# Altium PCB KRing_B2_A.PcbDoc
Units mm, origin at the board's own origin, x right, y up, seen from the top; angles counter-clockwise.
Board outline 37.8 x 37.8 mm, 2 copper layers (Top Layer, Bottom Layer); 63 components, 35 nets, 226 pads, 135 vias.
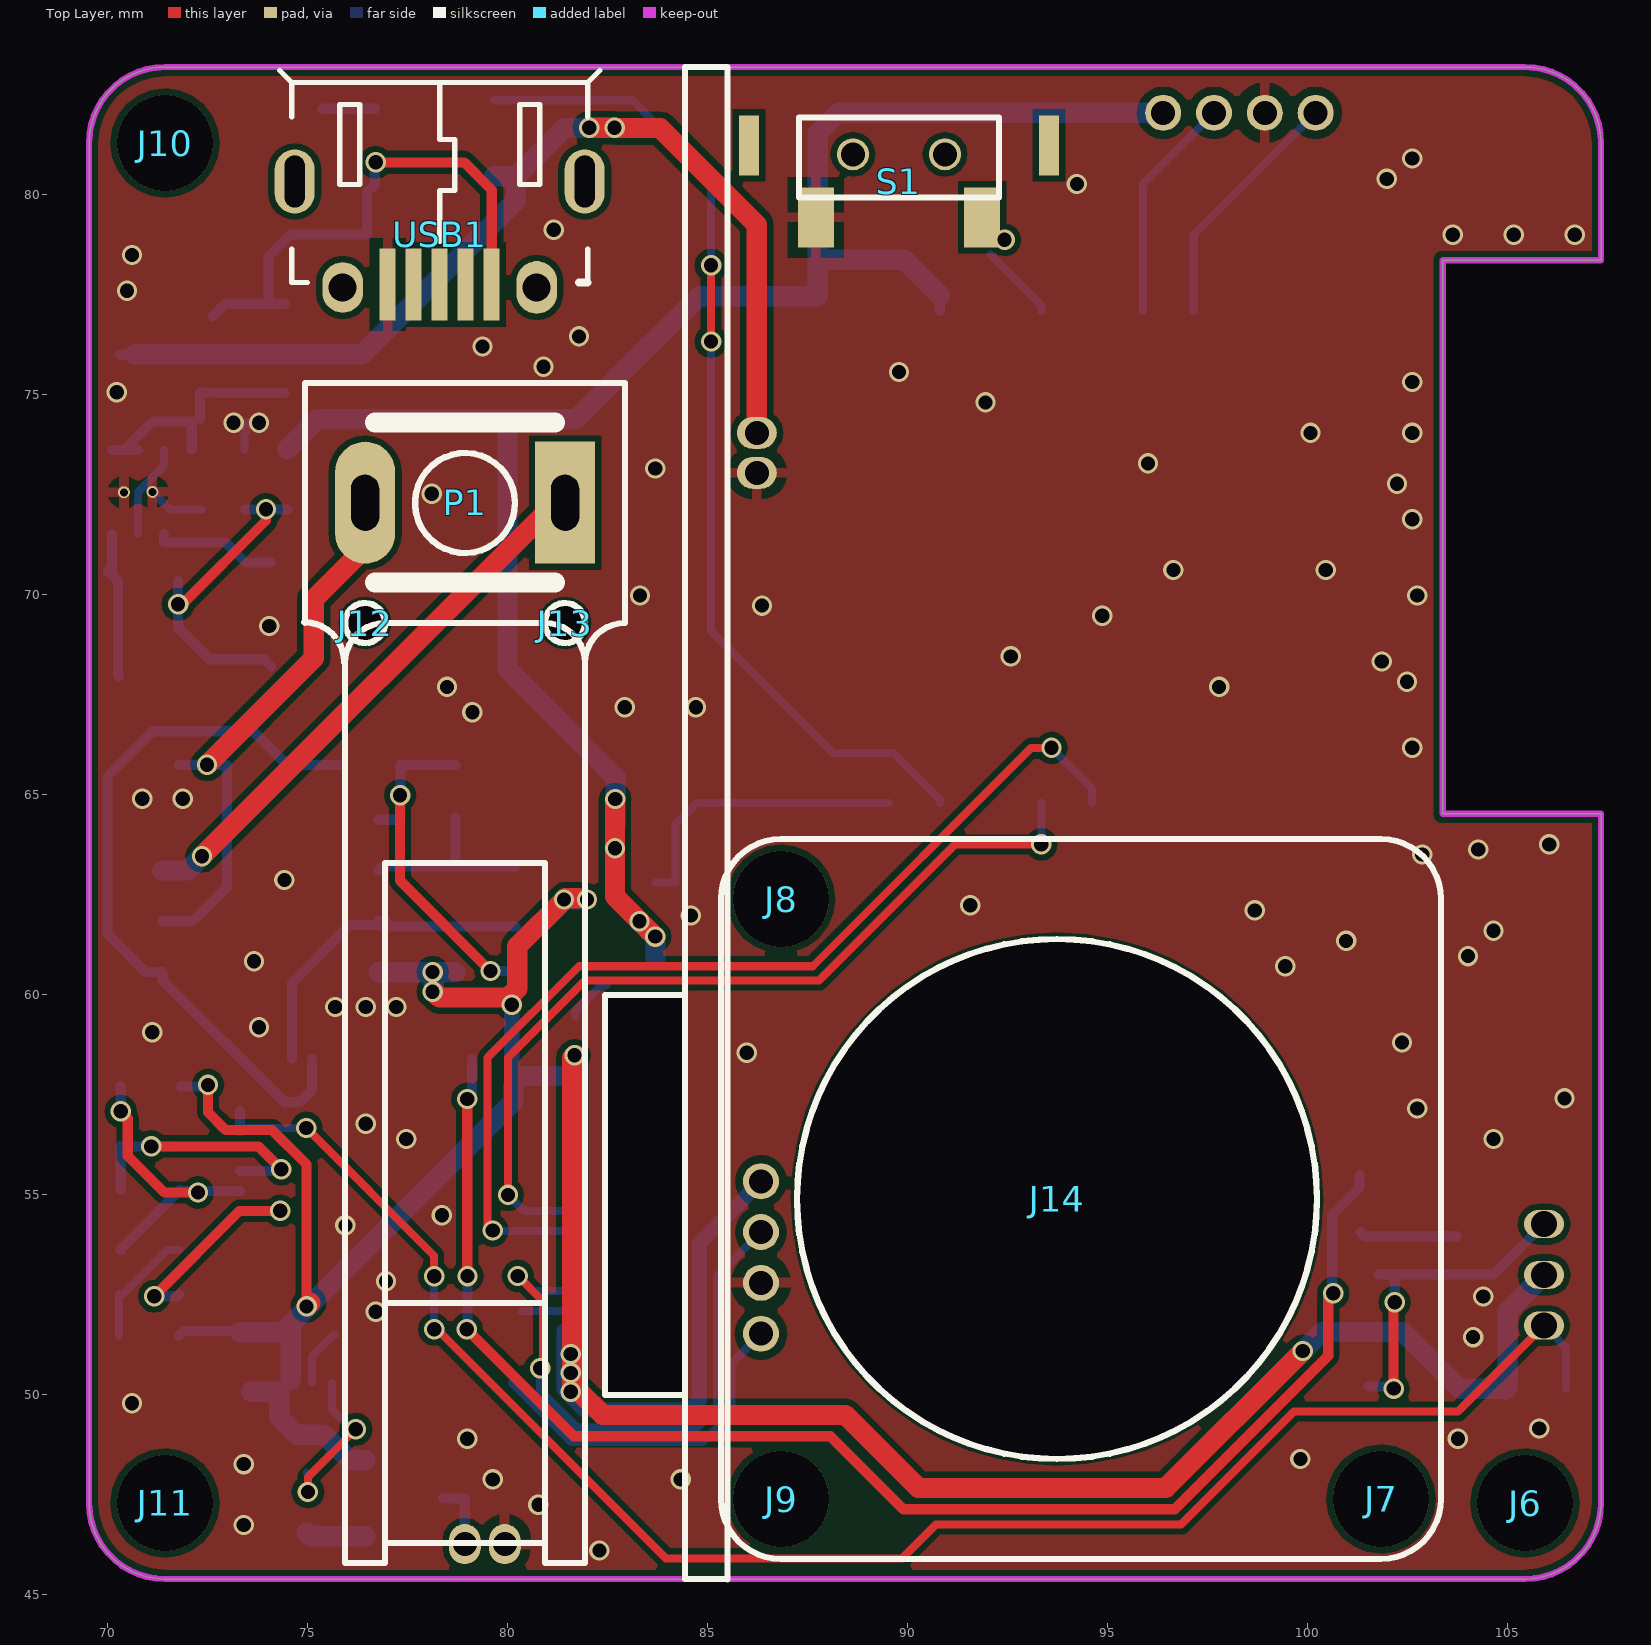
[diagram p0: Top Layer view]
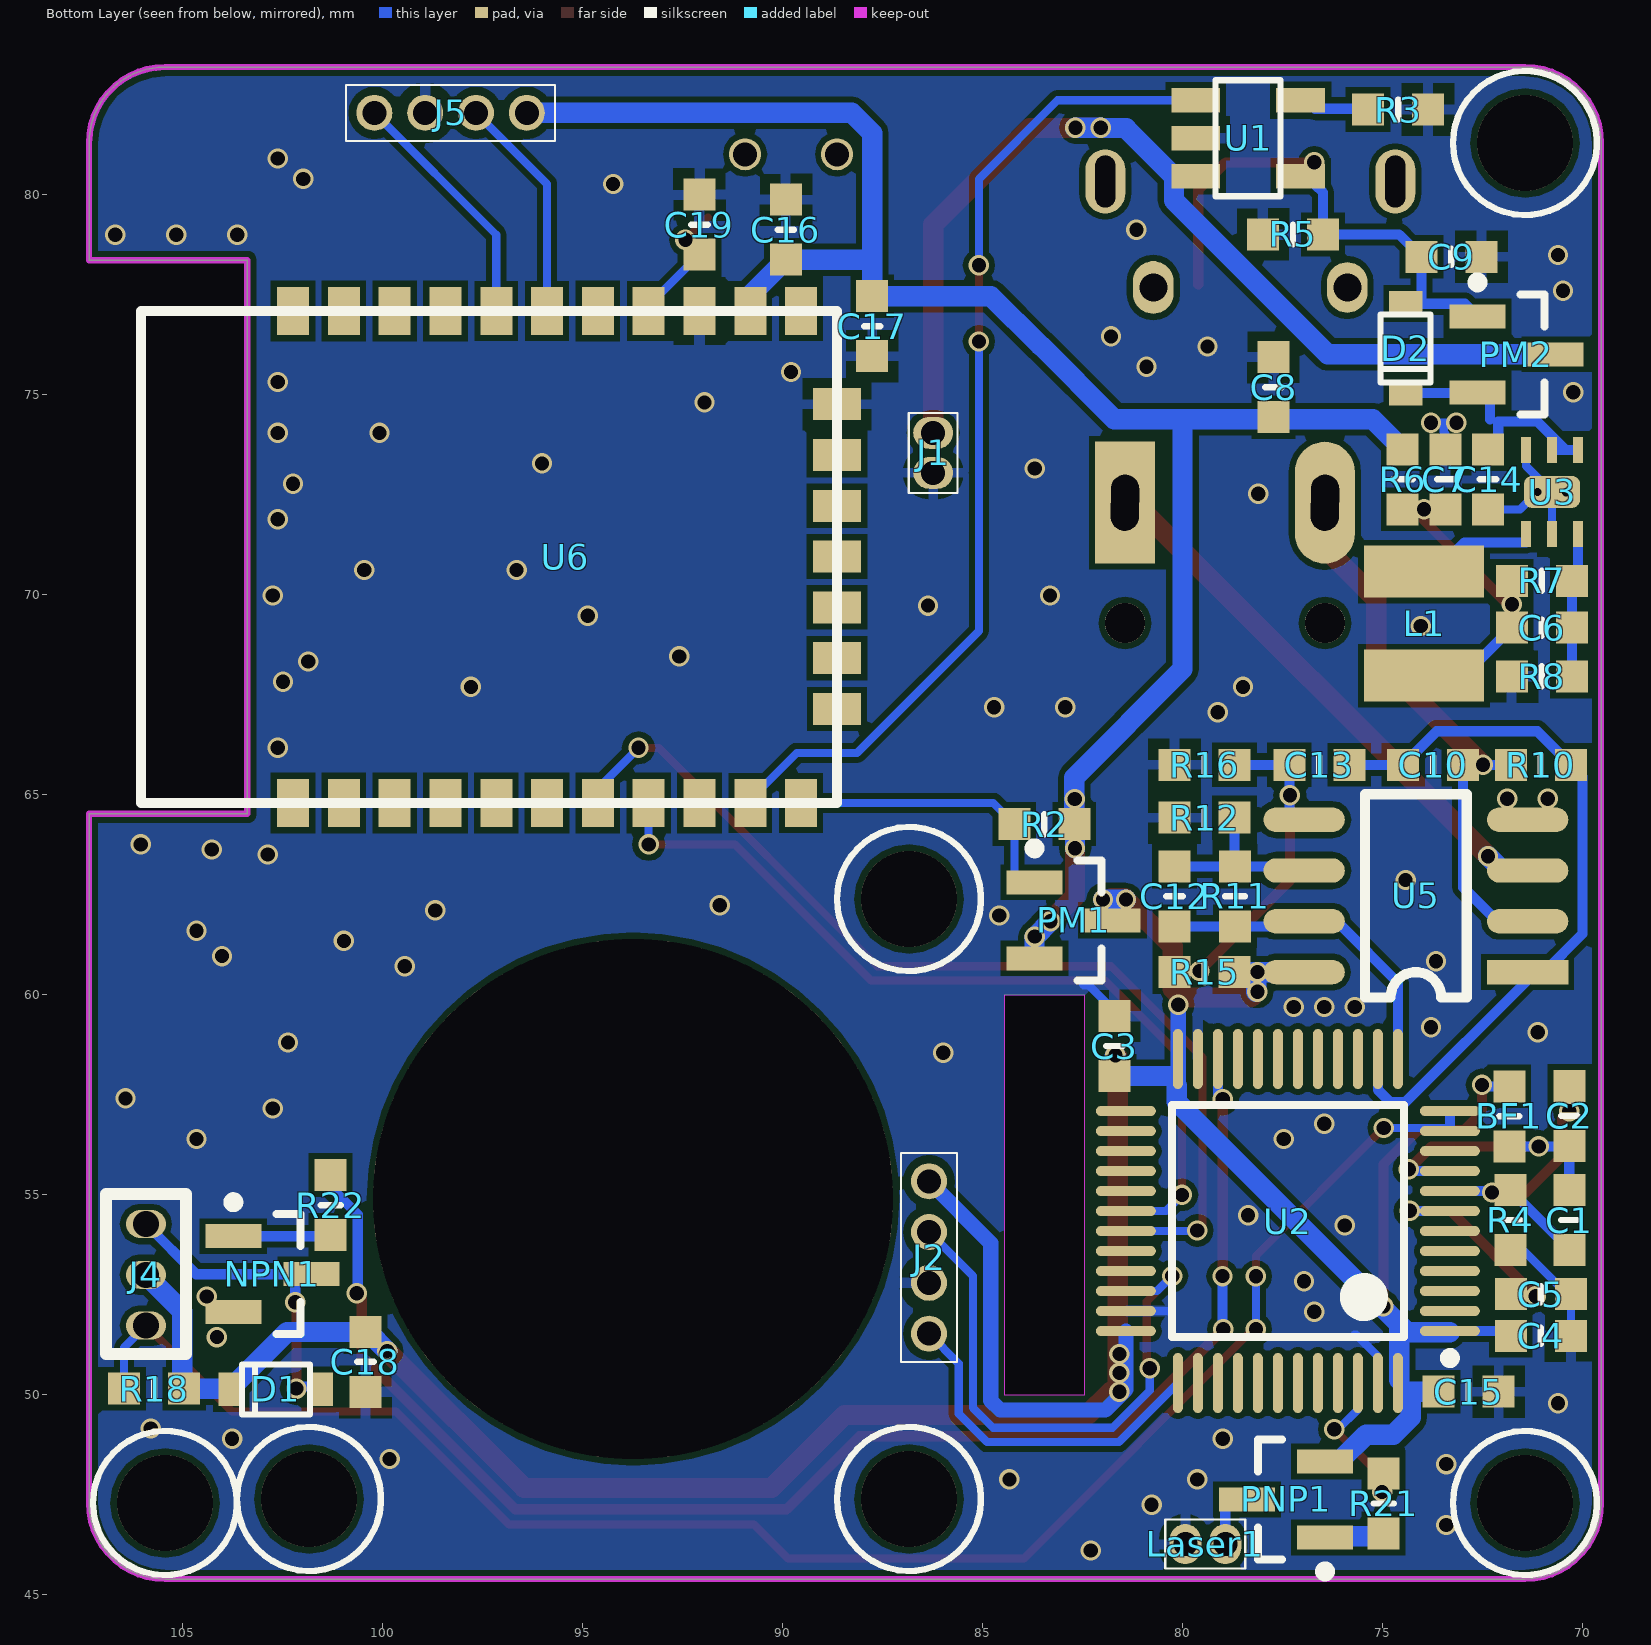
[diagram p1: Bottom Layer view, seen from below]

## Layer stack, top to bottom
Top Layer: signal copper 0.0356
Dielectric: dielectric 0.32, FR-4, Dk 4.8
Bottom Layer: signal copper 0.0356

## Board outline
69.537,47.288 69.537,81.288 cw(c71.437,81.288) 71.437,83.188 105.437,83.188 cw(c105.437,81.288) 107.337,81.288 107.337,78.359 103.378,78.359 103.378,64.516 107.337,64.516 107.337,47.288 cw(c105.437,47.288) 105.437,45.388 71.437,45.388 cw(c71.437,47.288)
cut-out: 82.445,59.976 84.452,59.976 84.452,49.994 82.445,49.994

## Design rules (kind name [scope] priority, off if disabled: settings)
Clearance "6mil Special" [(HasFootprint('FPC 0.5mm 4P') OR HasFootprint('FPC 0.5mm 16P') OR HasFootprint('QFN40P500X500X90_HS-41L'))] p1: gap=0.152
Clearance "8mil all" [All] p2: gap=0.152
ComponentClearance [All] p1: gap=-100 collisioncheckmode=3 verticalgap=0.254 showdistances=FALSE
Height [All] p1: minheight=0 maxheight=50.8 prefheight=12.7
HoleSize [All] p1: absolutevalues=TRUE maxlimit=1817.048 minlimit=0 maxpercent=80.000 minpercent=20.000
HoleToHoleClearance [All] p1: gap=0.203 allowstackedmicrovias=TRUE
MinimumSolderMaskSliver [All] p1: minsoldermaskwidth=0
PolygonConnect PolygonConnect_1 [isvia] p1: connectstyle=Direct reliefconductorwidth=0.254 reliefentries=4 polygonreliefangle="90 Angle" airgapwidth=0.254
PolygonConnect [All] p2: connectstyle=Relief reliefconductorwidth=0.254 reliefentries=4 polygonreliefangle="90 Angle" airgapwidth=0.254
RoutingCorners [All] p1: cornerstyle=45-Degree minsetback=0.254 maxsetback=2.54
RoutingVias [All] p1: holewidth=0.356 width=0.508 viastyle="Through Hole" minholewidth=0.356 minwidth=0.508 maxholewidth=2.54 maxwidth=5.08
SilkToSilkClearance [All] p1: silktosilkclearance=0
SilkToSolderMaskClearance [IsPad] p1: minsilkscreentomaskgap=0 clearancetoexposedcopper=TRUE
SolderMaskExpansion [All] p1: expansion=0.102
Width 20mil_Power [(InNet('EP_SUPPLY&VBAT') OR InNet('PSUPPLY') OR InNet('P_3.3V') OR InNet('PSUPPLYBAT') OR InNet('P_3.3V') OR InNet('P_5V'))] p1: maxlimit=1000 minlimit=0.203 preferedwidth=0.508
Width 8mil_Basic [All] p2: maxlimit=100 minlimit=0.203 preferedwidth=0.254
20 further rules are at their usual default settings.

## Components (designator, comment, footprint, x,y, rotation, side; value= is the part's Value field where it differs from the comment)
BF1 "BF" R0603 71.828,56.954 r90 bottom
C1 "1uf" C0603 70.329,54.363 r90 bottom
C2 "0.1uf" C0603 70.329,56.967 r270 bottom
C3 "1uf" C0603 81.7,58.713 r270 bottom
C4 "1uf" C0603 71.041,51.467 r0 bottom
C5 "1uf" C0603 71.041,52.509 r0 bottom
C6 "22pf" C0603 71.015,69.171 r180 bottom
C7 "10uf" C0603 73.428,72.88 r270 bottom
C8 "1uf" C0603 77.724,75.184 r270 bottom
C9 "1uf" C0603 73.276,78.442 r0 bottom
C10 "6.8pF" C0603 73.733,65.742 r180 bottom
C12 "240pF" C0603 80.198,62.454 r90 bottom
C13 "0.15uf" C0603 76.578,65.742 r180 bottom
C14 "10uf" C0603 72.361,72.88 r270 bottom
C15 "1uf" C0603 72.844,50.07 r180 bottom
C16 "1uf" C0603 89.916,79.121 r90 bottom
C17 "1uf" C0603 87.757,76.708 r270 bottom
C18 "10uf" C0603 100.426,50.815 r90 bottom
C19 "10uf" C0603 92.075,79.248 r270 bottom
D1 "1N5817" SOD323(0805) 102.667,50.13 r0 bottom
D2 "1N5817" SOD323(0805) 74.419,76.156 r270 bottom
J1 "CON2" BATTRY_CONNECTOR 86.233,74.041 r270 bottom
J2 "CON4" "CON4 1MM" 86.337,53.426 r90 bottom
J4 "CON3" "Motor Connector" 105.913,52.992 r270 bottom
J5 "CON4" "CON4 1MM" 98.298,82.042 r180 bottom
J6 "CON1" 2.4mm#1 105.534,47.276 r0 top
J7 "CON1" 2.4mm#2 101.876,47.454 r0 top
J8 "CON1" 2.4mm#3 86.839,62.389 r0 top
J9 "CON1" 2.4mm#4 86.712,47.429 r0 top
J10 "CON1" 2.4mm#5 71.523,81.312 r0 top
J11 "CON1" 2.4mm#6 71.437,47.276 r0 top
J12 "CON1" 0.5mm 76.437,69.288 r0 top
J13 "CON1" 0.5mm 81.437,69.288 r0 top
J14 "CON1" 6.5mm 93.799,54.947 r0 top
L1 "4.7uh" GDNR3012 73.962,69.273 r180 bottom
Laser1 "Laser" BATTRY_CONNECTOR 78.931,46.26 r0 bottom
NPN1 "8050" SOT23-3 102.753,53.008 r180 bottom
P1 "photodetector" BPW34 78.94,72.295 r180 top
PM1 "Si2303" SOT23-3 82.724,61.855 r180 bottom
PM2 "Si2303" SOT23-3 71.65,76.004 r180 bottom
PNP1 "8550" SOT23-3 77.411,47.377 r0 bottom
R2 "100K" R0603 83.454,64.261 r180 bottom
R3 "20K" R0603 74.61,82.125 r0 bottom
R4 "0" R0603 71.803,54.363 r90 bottom
R5 "1M" R0603 77.238,79.001 r0 bottom
R6 "50R" R0603 74.495,72.88 r270 bottom
R7 "120K" R0603 71.015,70.34 r0 bottom
R8 "27K" R0603 71.015,67.952 r0 bottom
R10 "10M" R0603 71.041,65.742 r180 bottom
R11 "220K" R0603 78.686,62.454 r270 bottom
R12 "3K" R0603 79.448,64.421 r180 bottom
R15 "2M" R0603 79.448,60.561 r180 bottom
R16 "510" R0603 79.448,65.742 r180 bottom
R18 "10K" R0603 105.709,50.148 r180 bottom
R21 "1K" R0603 74.973,47.276 r90 bottom
R22 "1K" R0603 101.298,54.736 r90 bottom
S1 "SW_Mini" SW_Mini 89.786,80.728 r180 top
U1 "LTC4054" LTC4054 78.359,81.407 r270 bottom
U2 "STM32F103C8T6" TSQFP50P900X900X160-48L 77.365,54.338 r0 bottom
U3 "TPS62260" QFN2x2-6 71.411,71.516 r90 bottom
U5 "LMC6482" LMC6482 71.371,60.561 r0 bottom
U6 "DA14580_Flash" DA14580_Flash 89.535,77.089 r180 bottom
USB1 "MicroUSB" MICROUSB 78.305,79.001 r270 top locked

## Footprints (in the part's own frame and the unit in brackets; to place one, negate y for a bottom-side part, rotate by r counter-clockwise, add the part's x,y. Pads: shape width x height; smd on the part's side, far side on the other; paste and mask are expansions set on the pad)
0.5mm [mm]
  round 1 hole 1: 1(0,0)
2.4mm#1 [mm]
  round 2.4 hole 2.4: 1(-0.097,0.012)
2.4mm#2 [mm]
  round 2.4 hole 2.4: 1(-0.039,-0.066)
2.4mm#3 [mm]
  round 2.4 hole 2.4: 1(-0.002,-0.001)
2.4mm#4 [mm]
  round 2.4 hole 2.4: 1(0.125,-0.041)
2.4mm#5 [mm]
  round 2.4 hole 2.4: 1(-0.086,-0.024)
2.4mm#6 [mm]
  round 2.4 hole 2.4: 1(0,0.012)
6.5mm [mm]
  round 13 hole 13 unplated: ""(-0.062,-0.059)
BATTRY_CONNECTOR [mm]
  oval 0.8x1 hole 0.6: 1(0,0) 2(1,0)
  silkscreen extent -0.5,-0.61 1.5,0.61
BPW34 [mm]
  rect 1.5x3.048 hole 0.7 slot 1.4 at 90.5 deg: A(-2.5,0)
  oval 1.5x3.048 hole 0.7 slot 1.4 at 90.5 deg: C(2.5,0)
  silkscreen extent -2.25,-2 2.25,2
C0603 [mm]
  rect 0.8x0.8 smd: 1(-0.75,0) 2(0.75,0)
  silkscreen extent 0,-0.2 0,0.2, body extent -0.8,-0.4 0.8,0.4, height 0.8
"CON4 1MM" [mm]
  round 0.9 hole 0.6: 1(-1.905,0) 2(-0.635,0) 3(0.635,0) 4(1.905,0)
  silkscreen extent -2.62,-0.7 2.62,0.7
DA14580_Flash [mm]
  rect 0.8x1.2 smd: 1(-12.7,-12.3) 2(-11.43,-12.3) 3(-10.16,-12.3) 4(-8.89,-12.3) 5(-7.62,-12.3) 6(-6.35,-12.3) 7(-5.08,-12.3) 8(-3.81,-12.3) 9(-2.54,-12.3) 10(-1.27,-12.3) 11(0,-12.3) 19(0,0) 20(-1.27,0) 21(-2.54,0) 22(-3.81,0) 23(-5.08,0) 24(-6.35,0) 25(-7.62,0) 26(-8.89,0) 27(-10.16,0) 28(-11.43,0) 29(-12.7,0)
  rect 1.2x0.8 smd: 12(0.9,-9.95) 13(0.9,-8.68) 14(0.9,-7.41) 15(0.9,-6.14) 16(0.9,-4.87) 17(0.9,-3.6) 18(0.9,-2.33)
  silkscreen extent -16.5,-12.3 0.9,0, body extent -16.51,-12.26 0.92,-0.01, height 1.45
GDNR3012 [mm]
  rect 3x1.3 smd: 1(0,1.3) 2(0,-1.3)
  body extent -1.5,-1.5 1.5,1.5, height 1.2
LMC6482 [mil]
  rect 80x24 smd: 1(0,0)
  oval 80x24 smd: 2(0,-50) 3(0,-100) 4(0,-150) 5(220,-150) 6(220,-100) 7(220,-50) 8(220,0)
  silkscreen extent 60,-175 160,25, body extent 24,-176 196,27, height 43
LTC4054 [mm]
  rect 0.62x1.22 smd: 1(-0.95,-1.31) 2(0,-1.31) 3(0.95,-1.31) 4(0.95,1.31) 5(-0.95,1.31)
  silkscreen extent -1.45,-0.81 1.45,0.81, body extent -1.45,-0.82 1.45,0.81, height 1
MICROUSB [mm]
  oval 1.6x1 hole 0.5 slot 1.3 at 0 deg unplated: 0(-1.325,3.625) 0(-1.325,-3.625)
  rect 1.8x0.4 smd: 1(1.25,1.3) 2(1.25,0.65) 3(1.25,0) 4(1.25,-0.65) 5(1.25,-1.3)
  oval 1.321x1.016 hole 0.7 unplated: ""(1.325,2.425)
  oval 1.27x1.016 hole 0.7 unplated: ""(1.325,-2.425)
  silkscreen extent -4.1,-4 1.2,4, body extent -3.62,-3.96 1.81,4.02, height 2.99
"Motor Connector" [mm]
  oval 0.7x1 hole 0.65: 1(-1.27,0) 2(0,0) 3(1.27,0)
  silkscreen extent -2.02,-1 1.98,1
QFN2x2-6 [mm]
  rect 0.65x0.25 smd: 1(0,0) 2(0,-0.65) 3(0,-1.3) 4(2.1,-1.3) 5(2.1,-0.65) 6(2.1,0)
  round 0.3 hole 0.2: 7(1.04,-1) 7(1.05,-0.29)
  rrect50% 0.8x1.4 smd: 7(1.05,-0.65)
  body extent 0.22,-1.59 1.86,0.29, height 0.8
R0603 [mm]
  rect 0.8x0.8 smd: 1(-0.75,0) 2(0.75,0)
  silkscreen extent 0,-0.25 0,0.25, body extent -0.8,-0.4 0.8,0.4, height 0.5
SOD323(0805) [mm]
  rect 0.63x0.83 smd: A(-1.115,0) C(1.115,0)
  silkscreen extent -0.85,-0.63 0.85,0.63, body extent -0.85,-0.63 0.86,0.63, height 1.1
SOT23-3 [mm]
  rect 1.4x0.6 smd: 1(-0.975,0.95) 2(-0.975,-0.95) 3(0.975,0)
  silkscreen extent -1.1,-1.5 0.7,1.92, body extent -0.7,-1.5 0.7,1.5, height 1
SW_Mini [mm]
  rect 0.9x1.5 smd: 1(2.08,1.3) 2(-2.08,1.3)
  rect 0.5x1.5 smd: ""(-3.75,-0.5) ""(3.75,-0.5)
  round 0.8 hole 0.6: ""(-1.15,-0.277) ""(1.15,-0.277)
  silkscreen extent -2.5,-1.2 2.5,0.8, body extent -3.76,-2.28 3.74,1.72, height 3.4
TSQFP50P900X900X160-48L [mm] "TSQFP, 48-Leads, Body 7.00x7.00mm, Pitch 0.50mm, IPC High Density"
  oval 1.5x0.25 smd: 1(-4.05,2.75) 2(-4.05,2.25) 3(-4.05,1.75) 4(-4.05,1.25) 5(-4.05,0.75) 6(-4.05,0.25) 7(-4.05,-0.25) 8(-4.05,-0.75) 9(-4.05,-1.25) 10(-4.05,-1.75) 11(-4.05,-2.25) 12(-4.05,-2.75) 25(4.05,-2.75) 26(4.05,-2.25) 27(4.05,-1.75) 28(4.05,-1.25) 29(4.05,-0.75) 30(4.05,-0.25) 31(4.05,0.25) 32(4.05,0.75) 33(4.05,1.25) 34(4.05,1.75) 35(4.05,2.25) 36(4.05,2.75)
  oval 0.25x1.5 smd: 13(-2.75,-4.05) 14(-2.25,-4.05) 15(-1.75,-4.05) 16(-1.25,-4.05) 17(-0.75,-4.05) 18(-0.25,-4.05) 19(0.25,-4.05) 20(0.75,-4.05) 21(1.25,-4.05) 22(1.75,-4.05) 23(2.25,-4.05) 24(2.75,-4.05) 37(2.75,4.05) 38(2.25,4.05) 39(1.75,4.05) 40(1.25,4.05) 41(0.75,4.05) 42(0.25,4.05) 43(-0.25,4.05) 44(-0.75,4.05) 45(-1.25,4.05) 46(-1.75,4.05) 47(-2.25,4.05) 48(-2.75,4.05)
  silkscreen extent -4.17,-2.9 2.9,3.55, body extent -3.5,-3.5 3.5,3.5, height 1.6

## Part data
BF1: "磁珠"
C1 C2 C3 C4 C5 C6 C7 C8 C9 C10 C12 C13 C14 C15 C16 C17 C18 C19: library part C
D1 D2: library part Diode
L1: library part L
NPN1: library part NPN
PM1 PM2: library part PMOS
PNP1: library part PNP
R2 R3 R4 R5 R6 R7 R8 R10 R11 R12 R15 R16 R18 R21 R22: library part R

## Via types
v1: diameter 0.508, hole 0.356, Top Layer to Bottom Layer, 135 vias

## Nets (pads, with @x,y where several pads share a name; then routed paths per layer and width w, separated by ;. In a path a pad name is that pad's centre, name@x,y a point inside that pad or via, vN(x,y) a via of type N, cw(c..) or ccw(c..) an arc to the next point about the centre after c; other vN are vias at no path point)
AGND: C1.1 C2.1 R4.2 U2.8 | length 7.6
  Top Layer w0.254: v1(70.329,57.081) 70.507,56.903 70.507,55.962 71.42,55.049 v1(72.26,55.049)
  Bottom Layer w0.254: C1.1 70.329,53.64 R4.2 71.828,55.088 v1@72.26,55.088 ; v1(70.329,57.081) C2.1 ; v1(72.26,55.049) v1@72.26,55.088 ; U2.8 v1@72.26,55.088
C_LASER: R21.2 U2.46 | length 4
  Top Layer w0.203: v1(75.009,47.565) 75.009,47.933 v1(76.207,49.131)
  Bottom Layer w0.203: R21.2@74.978,48.052 75.009,48.02 v1(75.009,47.565) ; U2.46 75.615,49.627 76.111,49.131 v1(76.207,49.131)
C_MOTOR: R22.2 U2.22 | length 36.7
  Top Layer w0.254: v1(78.98,51.632) 81.656,48.957 88.07,48.957 89.895,47.132 96.681,47.132 100.516,50.967 100.516,52.404 v1(100.643,52.531) ; v1(78.993,57.388) 78.993,52.966 v1(78.999,52.96)
  Bottom Layer w0.254: v1(78.98,51.632) 78.999,51.651 v1(78.999,52.96) ; v1(78.993,57.388) 79.115,57.51 U2.22 ; v1(100.643,52.531) 100.619,52.556 100.619,54.502 101.298,55.181 R22.2
CHARGE_STATES: U1.1 U6.10 | length 25.1
  Top Layer w0.203: v1(85.09,76.327) v1(85.09,78.232)
  Bottom Layer w0.203: U1.1 83.124,82.357 85.09,80.391 v1(85.09,78.232) ; v1(85.09,76.327) 85.09,69.088 88.138,66.04 89.643,66.04 90.805,64.878 U6.10
DA_RXD: U2.30 U6.8 | length 21.6
  Top Layer w0.203: v1(80.01,54.991) 80.01,58.427 81.934,60.35 87.782,60.35 91.186,63.754 v1(93.345,63.754)
  Bottom Layer w0.203: v1(80.01,54.991) 80.413,54.588 U2.30 ; v1(93.345,63.754) U6.8
DA_TXD: U2.31 U6.7 | length 25.3
  Top Layer w0.203: v1(79.629,54.102) 79.502,54.102 79.502,58.422 81.786,60.706 87.63,60.706 93.091,66.167 v1(93.599,66.167)
  Bottom Layer w0.203: v1(79.629,54.102) 79.643,54.088 U2.31 ; v1(93.599,66.167) 94.615,65.151 U6.7
EVCC: C9.2 D2.A PM2.1 R5.1 U1.4 USB1.1 | length 13.3
  Top Layer w0.254: v1(76.705,80.804) 78.915,80.804 79.605,80.114 USB1.1
  Bottom Layer w0.254: PM2.1 72.943,77.271 73.936,77.271 ; D2.A 73.936,77.271 ; v1(76.705,80.804) 76.679,80.779 76.679,80.246 76.488,80.054 R5.1 74.585,79.001 C9.2 74.026,77.361 73.936,77.271
GND: C3.1 C4.1 C5.1 C7.1 C8.1 C9.1 C14.2 C15.2 C16.2 C17.2 C18.1 C19.1 J1.2 J2.2 J5.2 Laser1.2 NPN1.2 R3.1 R4.1 R5.2 R8.2 R12.1 R16.1 S1.1 U1.2 U2.23 U2.35 U2.47 U3.2 U3.6 U3.7 U5.4 U6.18 U6.21 USB1.5 | length 11.8
  Bottom Layer w0.203: C4.1 C5.1 70.384,52.509 71.489,53.613 R4.1 ; U3.2 70.761,72.566 71.411,73.216 U3.6 ; U3.7@71.121,72.566 71.558,72.13 C14.2 ; v1(73.152,74.295) 73.469,74.295 ; C7.1 73.428,74.019 73.469,74.06 73.469,74.295 ; v1(73.787,74.295) 73.469,74.295 ; U2.47 75.115,50.949 75.663,51.496 75.695,51.496 ; 80.354,52.079 80.363,52.088 U2.35 ; C3.1 81.7,59.59 82.34,60.23 82.459,60.23 82.483,60.254
  other v1: 82.296,46.101 73.406,46.736 80.772,47.244 79.629,47.879 84.328,47.879 73.406,48.26 99.822,48.387 78.994,48.895 103.759,48.895 105.791,49.149 70.612,49.784 104.14,51.435 76.708,52.07 104.394,52.451 76.962,52.832 75.946,54.229 78.359,54.483 77.47,56.388 104.648,56.388 76.454,56.769 102.743,57.15 106.426,57.404 85.979,58.547 102.362,58.801 71.12,59.055 73.787,59.182 75.692,59.69 76.454,59.69 77.216,59.69 99.441,60.706 73.66,60.833 104.013,60.96 100.965,61.341 104.648,61.595 84.582,61.976 98.679,62.103 91.567,62.23 74.422,62.865 102.87,63.5 104.267,63.627 106.045,63.754 70.866,64.897 71.882,64.897 102.616,66.167 79.121,67.056 82.931,67.183 84.709,67.183 78.486,67.691 97.79,67.691 102.489,67.818 101.854,68.326 92.583,68.453 74.041,69.215 94.869,69.469 86.36,69.723 83.312,69.977 102.743,69.977 96.647,70.612 100.457,70.612 102.616,71.882 78.105,72.517 102.235,72.771 83.693,73.152 96.012,73.279 100.076,74.041 102.616,74.041 91.948,74.803 70.231,75.057 102.616,75.311 89.789,75.565 80.899,75.692 79.375,76.2 81.788,76.454 70.485,77.597 70.612,78.486 103.632,78.994 105.156,78.994 106.68,78.994 81.153,79.121 94.234,80.264 101.981,80.391 102.616,80.899
LASER_STATE: PM1.1 R2.1 U6.11 | length 7.5
  Bottom Layer w0.203: PM1.1 84.204,62.805 R2.1 84.732,64.789 U6.11
M_SIG: J4.3 R18.1 U2.11 U2.12 | length 42.9
  Top Layer w0.203: v1(74.97,56.664) 78.165,53.469 v1(78.165,52.954) ; v1(78.165,51.632) 78.233,51.632 83.96,45.905 89.862,45.905 90.708,46.751 96.839,46.751 99.663,49.575 103.765,49.575 J4.3
  Bottom Layer w0.203: U2.11 73.392,56.664 v1(74.97,56.664) ; v1(78.165,51.632) v1(78.165,52.954) ; J4.3 106.459,51.176 R18.1
  Bottom Layer w0.254: U2.11 U2.12
NetC5_2: C5.2 U2.7 | length 5.7
  Top Layer w0.254: v1(71.168,52.458) 73.301,54.592 v1(74.317,54.592)
  Bottom Layer w0.254: v1(71.168,52.458) 71.74,52.458 C5.2 ; U2.7 73.319,54.592 v1(74.317,54.592)
NetC6_1: C6.1 C7.2 L1.2 R6.2 R7.2 | length 8.2
  Top Layer w0.254: v1@71.867,69.755 73.962,71.85 v1(73.962,72.13)
  Bottom Layer w0.254: R7.2 v1(71.765,69.755) C6.1 72.553,68.384 73.906,68.384 L1.2@74.089,68.201 ; C7.2 v1(73.962,72.13) R6.2
NetC6_2: C6.2 R7.1 R8.1 U3.3 | length 3.7
  Bottom Layer w0.254: R7.1@70.01,70.595 R7.1 C6.2 70.265,67.977 R8.1@70.291,67.952 ; R7.1@70.111,70.595 U3.3
NetC10_2: C10.2 P1.C R10.1 U5.2 | length 14.4
  Top Layer w0.508: v1(72.488,65.742) 75.155,68.409 75.155,69.882 76.44,71.167 P1.C
  Bottom Layer w0.254: U5.2 72.133,61.831 72.983,62.681 C10.2 v1(72.488,65.742) R10.1
NetC12_2: C12.2 R11.1 R12.2 U5.6 | length 4.7
  Bottom Layer w0.254: U5.6@76.781,63.101 76.884,63.204 R11.1 ; R12.2 78.698,63.216 R11.1 ; C12.2 R11.1
NetC13_1: C13.1 R15.1 R16.2 U5.5 | length 9.3
  Top Layer w0.254: v1(77.314,64.98) 77.314,62.847 v1(79.575,60.586)
  Bottom Layer w0.254: U5.5@76.781,64.371 77.328,64.371 C13.1 R16.2 ; v1(79.575,60.586) 80.173,60.586 R15.1
NetC14_1: C14.1 D2.C PM2.2 U3.4 U3.5 | length 6.4
  Bottom Layer w0.254: 70.436,73.63 70.436,73.616 ; U3.5 70.436,73.616 ; C14.1@72.107,73.63 72.107,74.327 71.134,74.327 70.422,73.616 U3.4 70.436,73.616 ; 72.311,74.378 72.311,75.054 PM2.2 72.638,75.041 D2.C
NetD1_A: D1.A J4.1 NPN1.3 | length 8.6
  Top Layer w0.254: v1(102.153,50.148) 102.153,52.281 v1(102.179,52.307)
  Bottom Layer w0.254: D1.A@101.521,50.198 102.103,50.198 v1(102.153,50.148) ; v1(102.179,52.307) 102.179,53.008 NPN1.3 104.658,53.008 J4.1
NetL1_1: L1.1 U3.1 | length 3.1
  Bottom Layer w0.254: U3.1 71.411,71.305 72.946,71.305 73.449,70.801 L1.1@74.089,70.801
NetLaser1_1: Laser1.1 PNP1.3 | length 1.7
  Bottom Layer w0.254: PNP1.3@78.391,47.403 78.931,47.403 Laser1.1
NetNPN1_1: NPN1.1 R22.1 | length 2.4
  Bottom Layer w0.254: R22.1@101.329,54.059 101.43,53.958 NPN1.1
NetPNP1_1: PNP1.1 R21.1 | length 1.5
  Bottom Layer w0.508: R21.1@74.978,46.552 75.076,46.453 PNP1.1@76.441,46.453
NetR3_2: R3.2 U1.5 | length 1.3
  Bottom Layer w0.254: R3.2 75.38,82.146 U1.5@76.679,82.146
NSWCLK: J2.1 U2.37 | length 8.7
  Bottom Layer w0.203: U2.37 81.589,48.814 84.888,48.814 85.595,49.521 85.595,50.779 J2.1
NSWDIO: J2.3 U2.34 | length 14.3
  Top Layer w0.203: v1(80.258,52.964) 80.893,52.329 80.893,50.733 v1(80.817,50.657)
  Bottom Layer w0.203: v1(80.258,52.964) 80.635,52.588 U2.34 ; v1(80.817,50.657) 80.817,50.098 81.745,49.17 84.741,49.17 85.239,49.668 85.239,52.963 J2.3
OUT1: C10.1 C13.2 R10.2 U2.14 U5.1 | length 18.4
  Bottom Layer w0.254: U5.1@71.295,60.561 70.955,60.561 69.999,61.517 69.999,65.451 R10.2 71.129,66.58 73.645,66.58 C10.1 C13.2 ; U5.1 71.371,60.363 74.427,57.307 74.804,57.307 75.115,57.619 U2.14
OUT2: C12.1 R11.2 U2.13 U5.7 | length 8.4
  Bottom Layer w0.254: U2.13 74.615,60.3 76.057,61.742 U5.7@76.87,61.742 ; U5.7@76.781,61.831 U5.7@76.87,61.742 ; U5.7 U5.7@76.87,61.742 ; C12.1 R11.2 76.908,61.704 U5.7@76.87,61.742
P_3.3V: C8.2 C16.1 C17.1 J5.4 PM1.2 R2.2 R6.1 U6.20 | length 49.2
  Top Layer w0.508: v1(82.695,64.886) 82.685,64.876 v1(82.685,63.659) 82.685,62.456 v1(83.693,61.448)
  Bottom Layer w0.254: U6.20 U6.20@90.805,77.482
  Bottom Layer w0.508: R6.1 75.247,74.381 81.703,74.381 83.549,76.227 83.561,76.227 84.792,77.458 C17.1 ; 80,74.325 80,68.129 82.704,65.425 R2.2 82.685,64.242 v1(82.685,63.659) ; v1(83.3,61.833) 83.685,61.448 v1(83.693,61.448) 83.699,61.442 PM1.2 ; U6.20@90.805,77.482 C16.1 87.769,78.371 87.757,78.359 C17.1 ; J5.4 88.265,82.042 87.757,81.534 C17.1
P_C3.3V: BF1.2 C3.2 C4.2 C15.1 C18.2 D1.C J2.4 J4.2 PM1.3 PNP1.2 R15.2 R18.2 U2.1 U2.24 U2.36 U2.48 U5.8 | length 86.6
  Top Layer w0.254: v1(72.514,57.741) 72.514,57.055 72.959,56.61 74.12,56.61 74.978,55.752 v1(74.978,52.204)
  Top Layer w0.508: v1(74.978,52.204) v1@75.067,52.293 ; v1@78.154,60.069 78.297,59.926 80.024,59.926 80.241,60.143 80.241,61.203 v1(81.413,62.375) 81.445,62.407 v1@81.773,62.407 ; v1@81.615,50.07 v1@81.618,50.067 ; v1(81.677,58.48) 81.618,58.421 81.618,52.293 v1@81.618,50.067 ; v1(99.882,51.087) 96.46,47.665 90.272,47.665 88.447,49.49 82.375,49.49 81.798,50.067 v1@81.618,50.067
  Bottom Layer w0.254: C4.2 71.911,51.588 U2.1 ; BF1.2 72.476,57.704 v1(72.514,57.741) ; v1(74.978,52.204) v1@75.003,52.179 ; v1(80.106,59.744) v1@80.115,59.735 ; D1.C@103.751,50.198 D1.C@103.802,50.148 ; R18.2@104.959,49.995 R18.2
  Bottom Layer w0.381: v1(80.106,59.744) 80.106,57.761 U2.24@80.147,57.72 ; U2.36 81.415,50.128 81.93,49.614 84.557,49.614 84.795,49.852 84.795,53.789 J2.4
  Bottom Layer w0.508: U2.1@73.315,51.556 74.381,51.556 74.584,51.759 ; C15.1 74.292,50.07 74.292,49.426 74.726,48.992 75.412,48.992 76.051,48.353 PNP1.2@76.441,48.353 ; U2.48@74.584,50.362 74.584,51.759 ; 74.584,51.772 74.584,51.759 ; U5.8@76.781,60.561 v1(78.127,60.561) ; v1@78.154,60.069 78.154,60.534 v1(78.127,60.561) ; R15.2 v1(78.127,60.561) ; U2.24@80.147,57.72 80.147,57.322 75.003,52.179 74.584,51.759 ; 80.26,57.963 C3.2 81.7,58.457 v1(81.677,58.48) ; v1(81.413,62.375) v1(81.987,62.375) ; v1(99.882,51.087) 100.36,51.565 C18.2 102.384,51.565 D1.C@103.751,50.198 ; D1.C@103.802,50.148 R18.2 105.006,50.194 105.006,52.086 J4.2
  other v1: 81.578,50.067 81.578,50.541 81.578,51.013 78.127,60.069
SW_WAKEUP: C19.2 S1.2 U6.22 | length 2.7
  Top Layer w0.203: S1.2 v1(92.427,78.867)
  Bottom Layer w0.203: C19.2 93.345,77.228 U6.22
SWCLK: J5.1 U6.25 | length 6.2
  Bottom Layer w0.203: U6.25 97.155,78.994 J5.1
SWDIO: J5.3 U6.24 | length 5.7
  Bottom Layer w0.203: U6.24 95.885,80.264 J5.3
V0.58: P1.A U5.3 | length 13.9
  Top Layer w0.508: v1(72.361,63.456) 81.201,72.295 P1.A
  Bottom Layer w0.508: U5.3 72.006,63.101 v1(72.361,63.456)
VBAT: J1.1 PM2.3 U1.3 | length 26
  Top Layer w0.508: v1(82.042,81.672) v1(82.677,81.672) ; v1@82.677,81.661 83.82,81.661 86.233,79.248 J1.1
  Bottom Layer w0.254: PM2.3@70.32,76.004 PM2.3
  Bottom Layer w0.508: PM2.3 76.366,76.004 80.214,79.852 U1.3@80.214,80.457 ; U1.3 U1.3@80.214,80.457 ; 81.407,81.65 U1.3@80.214,80.457 ; 81.407,81.661 v1@82.031,81.661 ; v1(82.042,81.672) v1(82.677,81.672)
VDDA: BF1.1 C1.2 C2.2 U2.9 | length 7.1
  Top Layer w0.254: v1(71.091,56.204) 73.772,56.204 v1(74.343,55.633)
  Bottom Layer w0.254: C1.2 C2.2 70.343,56.204 v1(71.091,56.204) BF1.1 ; U2.9 74.297,55.588 v1(74.343,55.633)
pads on no net: J6.1 J7.1 J8.1 J9.1 J10.1 J11.1 J12.1 J13.1 J14. S1. U2.2 U2.3 U2.4 U2.5 U2.6 U2.10 U2.15 U2.16 U2.17 U2.18 U2.19 U2.20 U2.21 U2.25 U2.26 U2.27 U2.28 U2.29 U2.32 U2.33 U2.38 U2.39 U2.40 U2.41 U2.42 U2.43 U2.44 U2.45 U6.1 U6.2 U6.3 U6.4 U6.5 U6.6 U6.9 U6.12 U6.13 U6.14 U6.15 U6.16 U6.17 U6.19 U6.23 U6.26 U6.27 U6.28 U6.29 USB1. USB1.0 USB1.2 USB1.3 USB1.4

## Polygon pours and split planes (outlines as drawn)
GND on Bottom Layer "Bottom Layer-No Net" (solid, remove dead copper, pour order 4): 114.046,90.551 113.792,90.805 61.087,90.805 61.214,90.678 61.214,39.624 61.595,39.243 113.919,39.243
GND on Top Layer "Bottom Layer-No Net" (solid, remove dead copper, pour order 3): 114.3,89.789 114.046,90.043 61.341,90.043 61.468,89.916 61.468,38.862 61.849,38.481 114.173,38.481

## Keep-outs
Keep-Out Layer:
  the board outline again, w0.16

## Silkscreen, mask and mechanical layers (free items; w line width, h text height)
Top Overlay:
  circle w0.16: c93.737,54.888 r6.5
  circle w0.16: c76.437,69.288 r0.5
  circle w0.16: c81.437,69.288 r0.5
  circle w0.16: c78.937,72.288 r1.25
  lines w0.152: 85.337,47.388 ccw(c86.837,47.388) 86.837,45.888 101.837,45.888 ccw(c101.837,47.388) 103.337,47.388 103.337,62.388 ccw(c101.837,62.388) 101.837,63.888 86.837,63.888 ccw(c86.837,62.388) 85.337,62.388 85.337,47.388
  lines w0.16: 74.917,69.308 cw(c74.917,68.308) 75.917,68.308 ; 74.937,69.288 74.937,75.288 82.937,75.288 82.937,69.288 ccw(c82.937,68.288) 81.937,68.288 ; 76.937,46.288 80.937,46.288 ; 76.937,52.288 77,52.288 80.873,52.288 80.937,52.288 ; 85.491,83.188 84.437,83.188 84.437,45.388 85.493,45.388 ; 85.5,45.383 85.5,83.183 ; 81.937,68.288 ccw(c80.937,68.288) 80.937,69.288 76.937,69.288 ccw(c76.937,68.288) 75.937,68.288 75.937,45.788 76.937,45.788 76.937,63.288 80.937,63.288 80.937,45.788 81.937,45.788 81.937,68.288 ; 82.437,49.988 82.437,59.988 84.437,59.988 84.437,49.988 82.437,49.988
Bottom Overlay:
  circle w0.16: c71.437,47.288 r1.8
  circle w0.16: c71.437,81.288 r1.8
  circle w0.16: c105.437,47.288 r1.8
  circle w0.16: c86.837,47.388 r1.8
  circle w0.16: c86.837,62.388 r1.8
  circle w0.16: c101.837,47.388 r1.8